# Altium PCB PCB_Thu.PcbDoc (part 1 of 2)
Units mm, origin at the board's own origin, x right, y up, seen from the top; angles counter-clockwise.
Board outline 107.94 x 47.36 mm, 2 copper layers (Top Layer, Bottom Layer); 234 components, 35 nets, 885 pads, 0 vias.
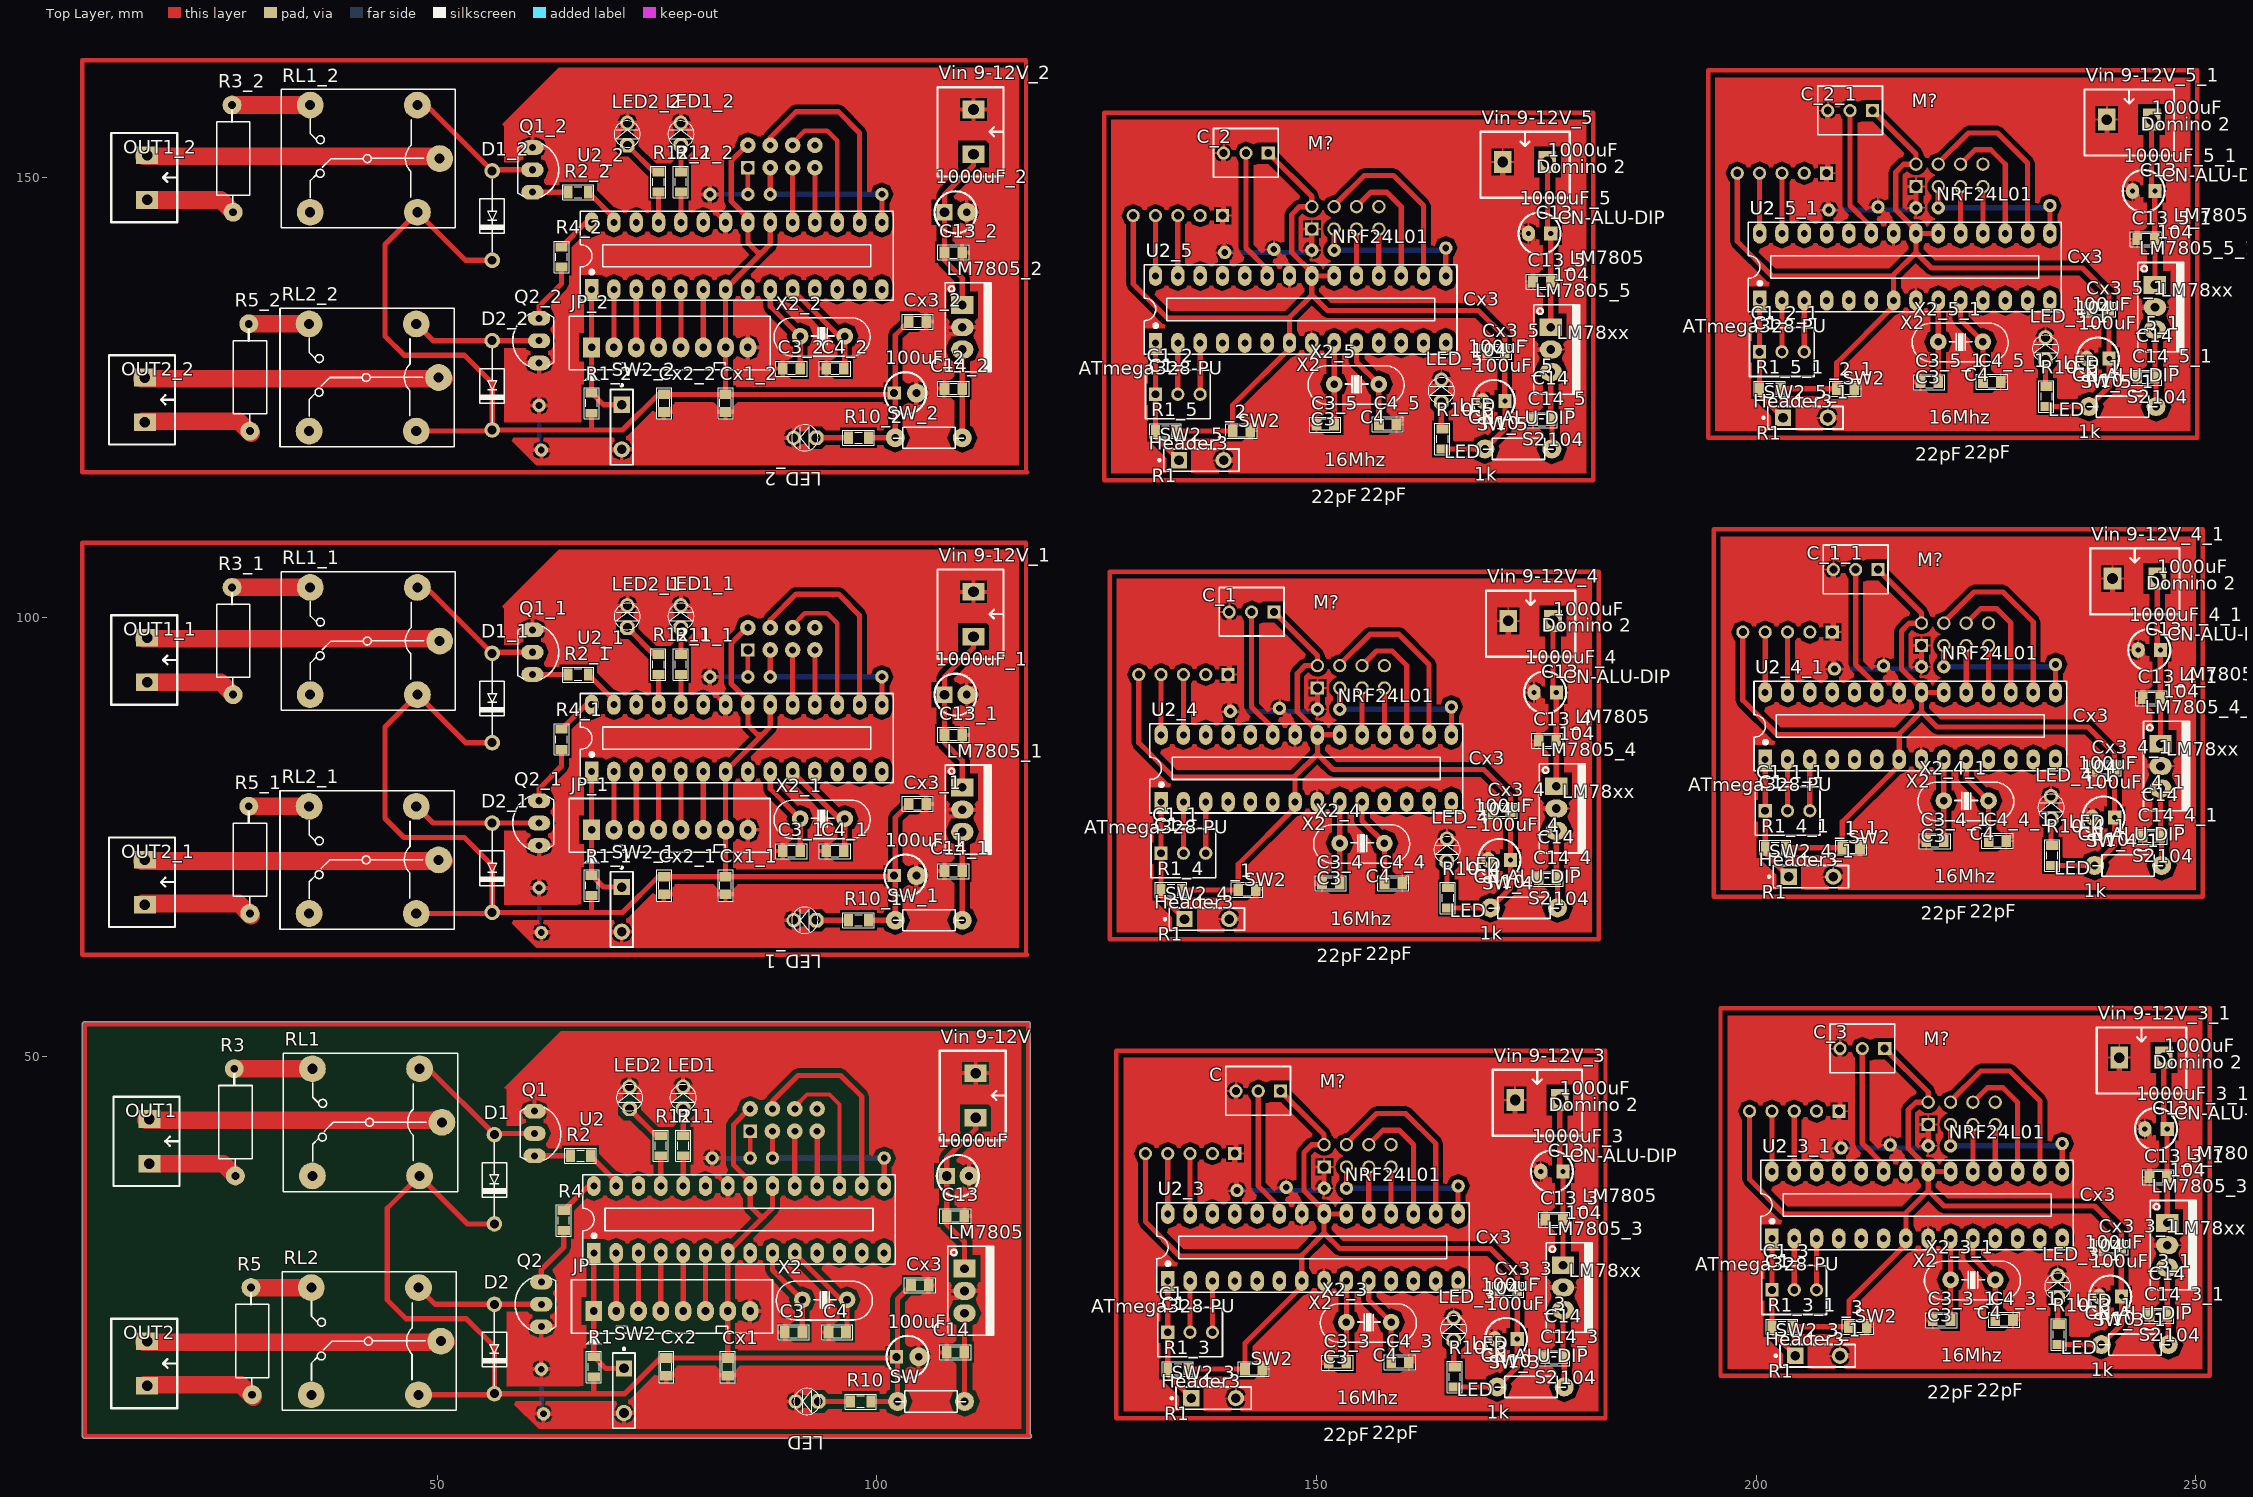
[diagram p0: Top Layer view]
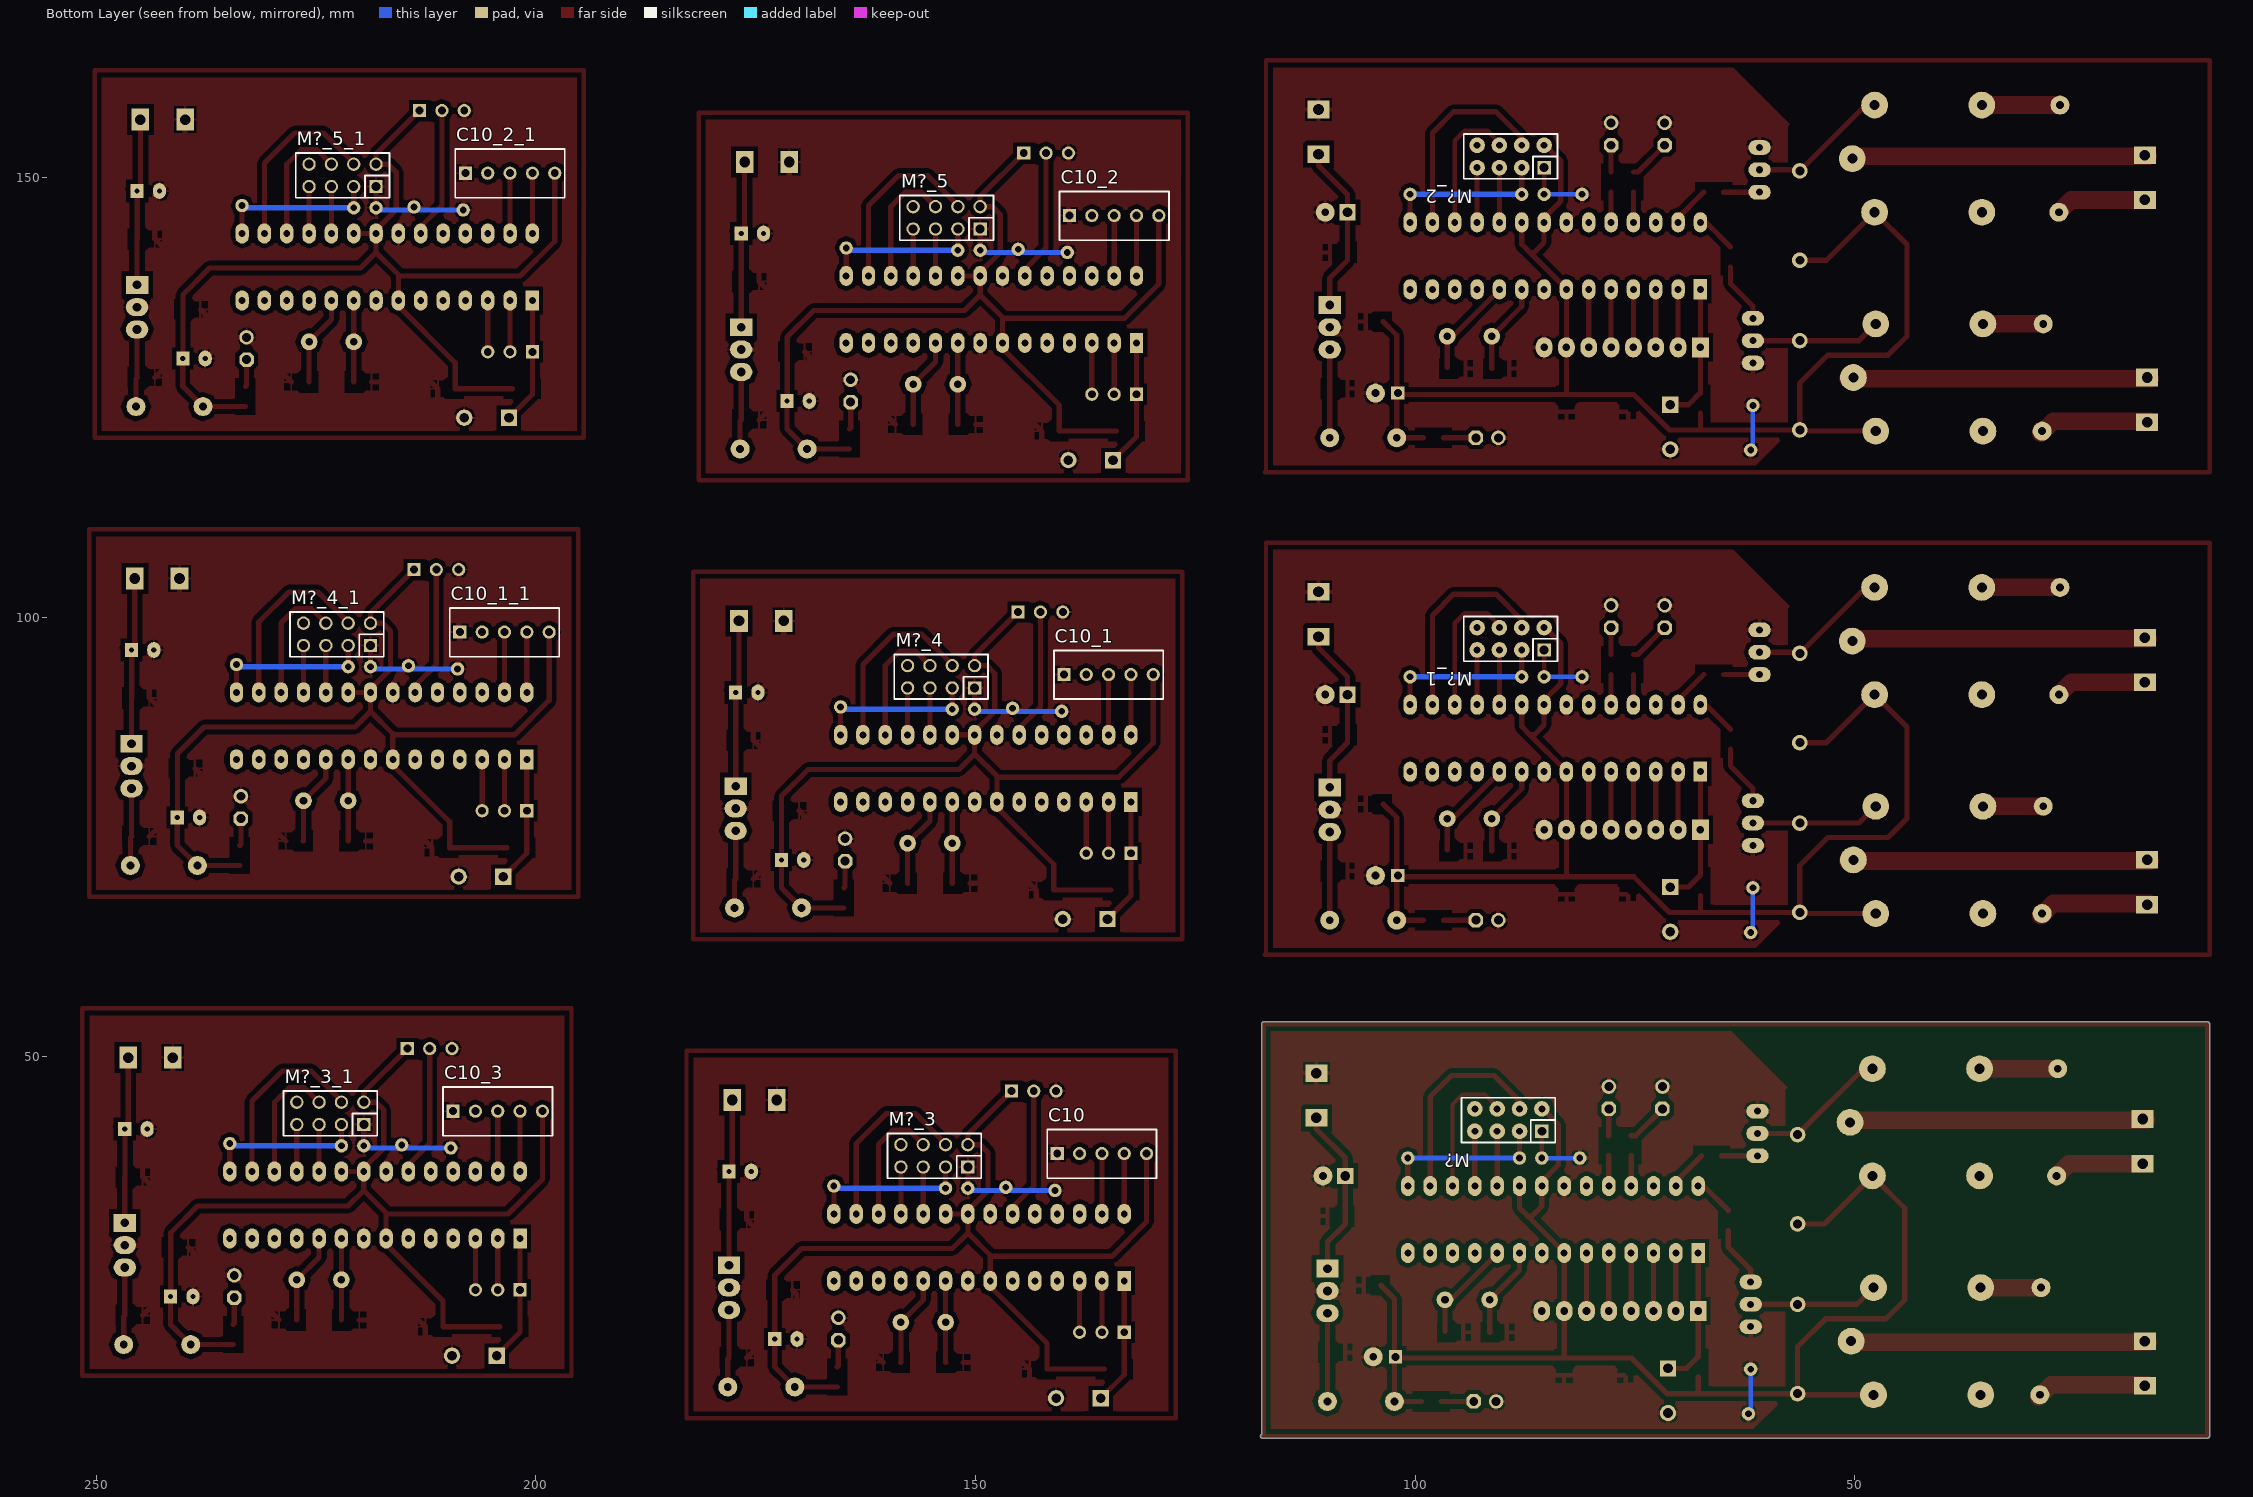
[diagram p1: Bottom Layer view, seen from below]

## Layer stack, top to bottom
Top Solder: solder mask 0.0102, Solder Resist, Dk 3.5
Top Layer: signal copper 0.0356
Dielectric 1: dielectric 0.32, FR-4, Dk 4.8
Bottom Layer: signal copper 0.0356
Bottom Solder: solder mask 0.0102, Solder Resist, Dk 3.5

## Board outline
9.656,6.858 ccw(c9.906,6.858) 9.906,6.608 117.348,6.608 ccw(c117.348,6.858) 117.598,6.858 ccw(c117.348,6.858) 117.471,7.076 117.471,53.721 ccw(c117.221,53.721) 117.221,53.971 9.906,53.971 ccw(c9.906,53.721) 9.656,53.721

## Design rules (kind name [scope] priority, off if disabled: settings)
Clearance [All] p1: gap=0.5
PlaneConnect [All] p1: planeconnectstyle=Relief reliefexpansion=0.508 reliefentries=4 reliefconductorwidth=0.5 reliefairgap=0.254
PolygonConnect [All] p1: connectstyle=Relief reliefconductorwidth=0.5 reliefentries=4 polygonreliefangle="90 Angle" airgapwidth=0.254
RoutingVias [All] p1: holewidth=0.711 width=1.27 viastyle="Through Hole" minholewidth=0.711 minwidth=1.27 maxholewidth=0.711 maxwidth=1.27
SolderMaskExpansion [All] p1: expansion=0.102
Width [All] p1: maxlimit=3 minlimit=0.5 preferedwidth=0.5
29 further rules are at their usual default settings.

## Classes and differential pairs
component class Schematic_Thu: 100uF 1000uF C3 C4 C13 C14 Cx1 Cx2 Cx3 D1 D2 JP LED LED1 LED2 LM7805 M? OUT1 OUT2 Q1 Q2 R1 R2 R3 R4 R5 R10 R11 R12 RL1 RL2 SW SW2 U2 "Vin 9-12V" X2

## Components (designator, comment, footprint, x,y, rotation, side; value= is the part's Value field where it differs from the comment)
100uF "CN-ALU-DIP" CA-ALU-2.54#1 103.505,15.875 r0 top
100uF_1 "CN-ALU-DIP" CA-ALU-2.54#1 103.251,70.612 r0 top (schematic designator 100uF)
100uF_2 "CN-ALU-DIP" CA-ALU-2.54#1 103.251,125.476 r0 top (schematic designator 100uF)
100uF_3 "CN-ALU-DIP" CA-ALU-2.54#2 171.577,17.907 r180 top (schematic designator 100uF)
100uF_3_1 "CN-ALU-DIP" CA-ALU-2.54#2 240.284,22.733 r180 top (schematic designator 100uF)
100uF_4 "CN-ALU-DIP" CA-ALU-2.54#2 170.815,72.39 r180 top (schematic designator 100uF)
100uF_4_1 "CN-ALU-DIP" CA-ALU-2.54#2 239.522,77.216 r180 top (schematic designator 100uF)
100uF_5 "CN-ALU-DIP" CA-ALU-2.54#2 170.18,124.587 r180 top (schematic designator 100uF)
100uF_5_1 "CN-ALU-DIP" CA-ALU-2.54#2 238.887,129.413 r180 top (schematic designator 100uF)
1000uF "CN-ALU-DIP" CA-ALU-2.54#3 109.22,36.449 r0 top
1000uF_1 "CN-ALU-DIP" CA-ALU-2.54#3 108.966,91.186 r0 top (schematic designator 1000uF)
1000uF_2 "CN-ALU-DIP" CA-ALU-2.54#3 108.966,146.05 r0 top (schematic designator 1000uF)
1000uF_3 "CN-ALU-DIP" CA-ALU-2.54#2 176.784,36.957 r180 top (schematic designator 1000uF)
1000uF_3_1 "CN-ALU-DIP" CA-ALU-2.54#2 245.491,41.783 r180 top (schematic designator 1000uF)
1000uF_4 "CN-ALU-DIP" CA-ALU-2.54#2 176.022,91.44 r180 top (schematic designator 1000uF)
1000uF_4_1 "CN-ALU-DIP" CA-ALU-2.54#2 244.729,96.266 r180 top (schematic designator 1000uF)
1000uF_5 "CN-ALU-DIP" CA-ALU-2.54#2 175.387,143.637 r180 top (schematic designator 1000uF)
1000uF_5_1 "CN-ALU-DIP" CA-ALU-2.54#2 244.094,148.463 r180 top (schematic designator 1000uF)
_1 "104" CN-SMD-0805 142.113,68.961 r180 top
_1_1 "104" CN-SMD-0805 210.82,73.787 r180 top
_2 "104" CN-SMD-0805 141.478,121.158 r180 top
_2_1 "104" CN-SMD-0805 210.185,125.984 r180 top
_3 "104" CN-SMD-0805 211.582,19.304 r180 top
C "Header3" HDR3 145.923,46.101 r180 top
C1 "Header3" HDR3 133.096,18.669 r0 top
C1_1 "Header3" HDR3 132.334,73.152 r0 top (schematic designator C1)
C1_1_1 "Header3" HDR3 201.041,77.978 r0 top (schematic designator C1)
C1_2 "Header3" HDR3 131.699,125.349 r0 top (schematic designator C1)
C1_2_1 "Header3" HDR3 200.406,130.175 r0 top (schematic designator C1)
C1_3 "Header3" HDR3 201.803,23.495 r0 top (schematic designator C1)
C3 "22p" CN-SMD-0805 90.551,18.669 r0 top
C3_1 "22p" CN-SMD-0805 90.297,73.406 r0 top (schematic designator C3)
C3_2 "22p" CN-SMD-0805 90.297,128.27 r0 top (schematic designator C3)
C3_3 "22p" CN-SMD-0805 152.4,15.24 r0 top (schematic designator C3)
C3_3_1 "22p" CN-SMD-0805 221.107,20.066 r0 top (schematic designator C3)
C3_4 "22p" CN-SMD-0805 151.638,69.723 r0 top (schematic designator C3)
C3_4_1 "22p" CN-SMD-0805 220.345,74.549 r0 top (schematic designator C3)
C3_5 "22p" CN-SMD-0805 151.003,121.92 r0 top (schematic designator C3)
C3_5_1 "22p" CN-SMD-0805 219.71,126.746 r0 top (schematic designator C3)
C4 "22p" CN-SMD-0805 95.504,18.669 r0 top
C4_1 "22p" CN-SMD-0805 95.25,73.406 r0 top (schematic designator C4)
C4_2 "22p" CN-SMD-0805 95.25,128.27 r0 top (schematic designator C4)
C4_3 "22p" CN-SMD-0805 159.512,15.24 r180 top (schematic designator C4)
C4_3_1 "22p" CN-SMD-0805 228.219,20.066 r180 top (schematic designator C4)
C4_4 "22p" CN-SMD-0805 158.75,69.723 r180 top (schematic designator C4)
C4_4_1 "22p" CN-SMD-0805 227.457,74.549 r180 top (schematic designator C4)
C4_5 "22p" CN-SMD-0805 158.115,121.92 r180 top (schematic designator C4)
C4_5_1 "22p" CN-SMD-0805 226.822,126.746 r180 top (schematic designator C4)
C10 "Header5" HDR5 140.716,38.989 r180 bottom
C10_1 "Header5" HDR5 139.954,93.472 r180 bottom (schematic designator C10)
C10_1_1 "Header5" HDR5 208.661,98.298 r180 bottom (schematic designator C10)
C10_2 "Header5" HDR5 139.319,145.669 r180 bottom (schematic designator C10)
C10_2_1 "Header5" HDR5 208.026,150.495 r180 bottom (schematic designator C10)
C10_3 "Header5" HDR5 209.423,43.815 r180 bottom (schematic designator C10)
C13 "104" CN-SMD-0805 108.966,31.877 r180 top
C13_1 "104" CN-SMD-0805 108.712,86.614 r180 top (schematic designator C13)
C13_2 "104" CN-SMD-0805 108.712,141.478 r180 top (schematic designator C13)
C13_3 "104" CN-SMD-0805 177.038,31.496 r0 top (schematic designator C13)
C13_3_1 "104" CN-SMD-0805 245.745,36.322 r0 top (schematic designator C13)
C13_4 "104" CN-SMD-0805 176.276,85.979 r0 top (schematic designator C13)
C13_4_1 "104" CN-SMD-0805 244.983,90.805 r0 top (schematic designator C13)
C13_5 "104" CN-SMD-0805 175.641,138.176 r0 top (schematic designator C13)
C13_5_1 "104" CN-SMD-0805 244.348,143.002 r0 top (schematic designator C13)
C14 "104" CN-SMD-0805 108.966,16.383 r0 top
C14_1 "104" CN-SMD-0805 108.712,71.12 r0 top (schematic designator C14)
C14_2 "104" CN-SMD-0805 108.712,125.984 r0 top (schematic designator C14)
C14_3 "104" CN-SMD-0805 177.038,15.748 r0 top (schematic designator C14)
C14_3_1 "104" CN-SMD-0805 245.745,20.574 r0 top (schematic designator C14)
C14_4 "104" CN-SMD-0805 176.276,70.231 r0 top (schematic designator C14)
C14_4_1 "104" CN-SMD-0805 244.983,75.057 r0 top (schematic designator C14)
C14_5 "104" CN-SMD-0805 175.641,122.428 r0 top (schematic designator C14)
C14_5_1 "104" CN-SMD-0805 244.348,127.254 r0 top (schematic designator C14)
C_1 "Header3" HDR3 145.161,100.584 r180 top (schematic designator C)
C_1_1 "Header3" HDR3 213.868,105.41 r180 top (schematic designator C)
C_2 "Header3" HDR3 144.526,152.781 r180 top (schematic designator C)
C_2_1 "Header3" HDR3 213.233,157.607 r180 top (schematic designator C)
C_3 "Header3" HDR3 214.63,50.927 r180 top (schematic designator C)
Cx1 "104" CN-SMD-0805 83.058,14.732 r90 top
Cx1_1 "104" CN-SMD-0805 82.804,69.469 r90 top (schematic designator Cx1)
Cx1_2 "104" CN-SMD-0805 82.804,124.333 r90 top (schematic designator Cx1)
Cx2 "104" CN-SMD-0805 76.073,14.732 r90 top
Cx2_1 "104" CN-SMD-0805 75.819,69.469 r90 top (schematic designator Cx2)
Cx2_2 "104" CN-SMD-0805 75.819,124.333 r90 top (schematic designator Cx2)
Cx3 "104" CN-SMD-0805 104.902,24.003 r180 top
Cx3_1 "104" CN-SMD-0805 104.648,78.74 r180 top (schematic designator Cx3)
Cx3_2 "104" CN-SMD-0805 104.648,133.604 r180 top (schematic designator Cx3)
Cx3_3 "104" CN-SMD-0805 171.831,23.495 r0 top (schematic designator Cx3)
Cx3_3_1 "104" CN-SMD-0805 240.538,28.321 r0 top (schematic designator Cx3)
Cx3_4 "104" CN-SMD-0805 171.069,77.978 r0 top (schematic designator Cx3)
Cx3_4_1 "104" CN-SMD-0805 239.776,82.804 r0 top (schematic designator Cx3)
Cx3_5 "104" CN-SMD-0805 170.434,130.175 r0 top (schematic designator Cx3)
Cx3_5_1 "104" CN-SMD-0805 239.141,135.001 r0 top (schematic designator Cx3)
D1 "Diode" DIO-1A 56.515,41.148 r270 top
D1_1 "Diode" DIO-1A 56.261,95.885 r270 top (schematic designator D1)
D1_2 "Diode" DIO-1A 56.261,150.749 r270 top (schematic designator D1)
D2 "Diode" DIO-1A 56.515,21.844 r270 top
D2_1 "Diode" DIO-1A 56.261,76.581 r270 top (schematic designator D2)
D2_2 "Diode" DIO-1A 56.261,131.445 r270 top (schematic designator D2)
JP "JP8" Header8 67.818,21.082 r0 top
JP_1 "JP8" Header8 67.564,75.819 r0 top (schematic designator JP)
JP_2 "JP8" Header8 67.564,130.683 r0 top (schematic designator JP)
LED "LED" LED-3MM-RED 93.345,10.795 r180 top
LED1 "LED" LED-3MM-RED 77.978,44.069 r90 top
LED1_1 "LED" LED-3MM-RED 77.724,98.806 r90 top (schematic designator LED1)
LED1_2 "LED" LED-3MM-RED 77.724,153.67 r90 top (schematic designator LED1)
LED2 "LED" LED-3MM-RED 71.882,44.069 r90 top
LED2_1 "LED" LED-3MM-RED 71.628,98.806 r90 top (schematic designator LED2)
LED2_2 "LED" LED-3MM-RED 71.628,153.67 r90 top (schematic designator LED2)
LED_1 "LED" LED-3MM-RED 93.091,65.532 r180 top (schematic designator LED)
LED_2 "LED" LED-3MM-RED 93.091,120.396 r180 top (schematic designator LED)
LED_3 "LED" LED-3MM-RED 165.608,17.78 r90 top (schematic designator LED)
LED_3_1 "LED" LED-3MM-RED 234.315,22.606 r90 top (schematic designator LED)
LED_4 "LED" LED-3MM-RED 164.846,72.263 r90 top (schematic designator LED)
LED_4_1 "LED" LED-3MM-RED 233.553,77.089 r90 top (schematic designator LED)
LED_5 "LED" LED-3MM-RED 164.211,124.46 r90 top (schematic designator LED)
LED_5_1 "LED" LED-3MM-RED 232.918,129.286 r90 top (schematic designator LED)
LM7805 "LM78xx" TO220-123 109.982,25.908 r270 top
LM7805_1 "LM78xx" TO220-123 109.728,80.645 r270 top (schematic designator LM7805)
LM7805_2 "LM78xx" TO220-123 109.728,135.509 r270 top (schematic designator LM7805)
LM7805_3 "LM78xx" TO220-123 178.054,26.289 r270 top (schematic designator LM7805)
LM7805_3_1 "LM78xx" TO220-123 246.761,31.115 r270 top (schematic designator LM7805)
LM7805_4 "LM78xx" TO220-123 177.292,80.772 r270 top (schematic designator LM7805)
LM7805_4_1 "LM78xx" TO220-123 245.999,85.598 r270 top (schematic designator LM7805)
LM7805_5 "LM78xx" TO220-123 176.657,132.969 r270 top (schematic designator LM7805)
LM7805_5_1 "LM78xx" TO220-123 245.364,137.795 r270 top (schematic designator LM7805)
M? "NRF24L01" JP4-C2T#1 89.408,42.799 r0 bottom
M?_1 "NRF24L01" JP4-C2T#1 89.154,97.536 r0 bottom (schematic designator M?)
M?_2 "NRF24L01" JP4-C2T#1 89.154,152.4 r0 bottom (schematic designator M?)
M?_3 "NRF24L01" JP4-C2T#2 154.686,38.735 r0 bottom (schematic designator M?)
M?_3_1 "NRF24L01" JP4-C2T#2 223.393,43.561 r0 bottom (schematic designator M?)
M?_4 "NRF24L01" JP4-C2T#2 153.924,93.218 r0 bottom (schematic designator M?)
M?_4_1 "NRF24L01" JP4-C2T#2 222.631,98.044 r0 bottom (schematic designator M?)
M?_5 "NRF24L01" JP4-C2T#2 153.289,145.415 r0 bottom (schematic designator M?)
M?_5_1 "NRF24L01" JP4-C2T#2 221.996,150.241 r0 bottom (schematic designator M?)
OUT1 "Domino 2" "DOMINO 2- 5mm" 17.272,40.386 r270 top
OUT1_1 "Domino 2" "DOMINO 2- 5mm" 17.018,95.123 r270 top (schematic designator OUT1)
OUT1_2 "Domino 2" "DOMINO 2- 5mm" 17.018,149.987 r270 top (schematic designator OUT1)
OUT2 "Domino 2" "DOMINO 2- 5mm" 17.018,15.113 r270 top
OUT2_1 "Domino 2" "DOMINO 2- 5mm" 16.764,69.85 r270 top (schematic designator OUT2)
OUT2_2 "Domino 2" "DOMINO 2- 5mm" 16.764,124.714 r270 top (schematic designator OUT2)
Q1 "2SC1815" TO92-123 61.087,41.275 r270 top
Q1_1 "2SC1815" TO92-123 60.833,96.012 r270 top (schematic designator Q1)
Q1_2 "2SC1815" TO92-123 60.833,150.876 r270 top (schematic designator Q1)
Q2 "2SC1815" TO92-123 61.849,21.844 r90 top
Q2_1 "2SC1815" TO92-123 61.595,76.581 r90 top (schematic designator Q2)
Q2_2 "2SC1815" TO92-123 61.595,131.445 r90 top (schematic designator Q2)
R1 "10k" RES-SMD-0805 67.818,14.732 r90 top
R1_1 "10k" RES-SMD-0805 67.564,69.469 r90 top (schematic designator R1)
R1_2 "10k" RES-SMD-0805 67.564,124.333 r90 top (schematic designator R1)
R1_3 "10k" RES-SMD-0805 134.239,14.478 r180 top (schematic designator R1)
R1_3_1 "10k" RES-SMD-0805 202.946,19.304 r180 top (schematic designator R1)
R1_4 "10k" RES-SMD-0805 133.477,68.961 r180 top (schematic designator R1)
R1_4_1 "10k" RES-SMD-0805 202.184,73.787 r180 top (schematic designator R1)
R1_5 "10k" RES-SMD-0805 132.842,121.158 r180 top (schematic designator R1)
R1_5_1 "10k" RES-SMD-0805 201.549,125.984 r180 top (schematic designator R1)
R2 "10k" RES-SMD-0805 66.294,38.735 r0 top
R2_1 "10k" RES-SMD-0805 66.04,93.472 r0 top (schematic designator R2)
R2_2 "10k" RES-SMD-0805 66.04,148.336 r0 top (schematic designator R2)
R3 "1k" RES-1/2W 27.051,43.053 r270 top
R3_1 "1k" RES-1/2W 26.797,97.79 r270 top (schematic designator R3)
R3_2 "1k" RES-1/2W 26.797,152.654 r270 top (schematic designator R3)
R4 "10k" RES-SMD-0805 64.389,31.369 r90 top
R4_1 "10k" RES-SMD-0805 64.135,86.106 r90 top (schematic designator R4)
R4_2 "10k" RES-SMD-0805 64.135,140.97 r90 top (schematic designator R4)
R5 "1k" RES-1/2W 28.956,18.161 r270 top
R5_1 "1k" RES-1/2W 28.702,72.898 r270 top (schematic designator R5)
R5_2 "1k" RES-1/2W 28.702,127.762 r270 top (schematic designator R5)
R10 "1k" RES-SMD-0805 98.171,10.795 r0 top
R10_1 "1k" RES-SMD-0805 97.917,65.532 r0 top (schematic designator R10)
R10_2 "1k" RES-SMD-0805 97.917,120.396 r0 top (schematic designator R10)
R10_3 "1k" RES-SMD-0805 165.735,13.589 r270 top (schematic designator R10)
R10_3_1 "1k" RES-SMD-0805 234.442,18.415 r270 top (schematic designator R10)
R10_4 "1k" RES-SMD-0805 164.973,68.072 r270 top (schematic designator R10)
R10_4_1 "1k" RES-SMD-0805 233.68,72.898 r270 top (schematic designator R10)
R10_5 "1k" RES-SMD-0805 164.338,120.269 r270 top (schematic designator R10)
R10_5_1 "1k" RES-SMD-0805 233.045,125.095 r270 top (schematic designator R10)
R11 "1k" RES-SMD-0805 77.978,39.878 r270 top
R11_1 "1k" RES-SMD-0805 77.724,94.615 r270 top (schematic designator R11)
R11_2 "1k" RES-SMD-0805 77.724,149.479 r270 top (schematic designator R11)
R12 "1k" RES-SMD-0805 75.438,39.878 r270 top
R12_1 "1k" RES-SMD-0805 75.184,94.615 r270 top (schematic designator R12)
R12_2 "1k" RES-SMD-0805 75.184,149.479 r270 top (schematic designator R12)
RL1 "Relay 10A/5V" "RELAY 5" 42.291,42.545 r180 top
RL1_1 "Relay 10A/5V" "RELAY 5" 42.037,97.282 r180 top (schematic designator RL1)
RL1_2 "Relay 10A/5V" "RELAY 5" 42.037,152.146 r180 top (schematic designator RL1)
RL2 "Relay 10A/5V" "RELAY 5" 42.164,17.653 r180 top
RL2_1 "Relay 10A/5V" "RELAY 5" 41.91,72.39 r180 top (schematic designator RL2)
RL2_2 "Relay 10A/5V" "RELAY 5" 41.91,127.254 r180 top (schematic designator RL2)
SW "Switch" RES-1/4W-SMALL 105.918,10.795 r0 top
SW2 "SW-PB" SPST-2 71.247,12.019 r270 top
SW2_1 "SW-PB" SPST-2 70.993,66.756 r270 top (schematic designator SW2)
SW2_2 "SW-PB" SPST-2 70.993,121.62 r270 top (schematic designator SW2)
SW2_3 "SW-PB" SPST-2 138.303,11.176 r0 top (schematic designator SW2)
SW2_3_1 "SW-PB" SPST-2 207.01,16.002 r0 top (schematic designator SW2)
SW2_4 "SW-PB" SPST-2 137.541,65.659 r0 top (schematic designator SW2)
SW2_4_1 "SW-PB" SPST-2 206.248,70.485 r0 top (schematic designator SW2)
SW2_5 "SW-PB" SPST-2 136.906,117.856 r0 top (schematic designator SW2)
SW2_5_1 "SW-PB" SPST-2 205.613,122.682 r0 top (schematic designator SW2)
SW_1 "Switch" RES-1/4W-SMALL 105.664,65.532 r0 top (schematic designator SW)
SW_2 "Switch" RES-1/4W-SMALL 105.664,120.396 r0 top (schematic designator SW)
SW_3 "Switch" RES-1/4W-SMALL 174.117,12.446 r0 top (schematic designator SW)
SW_3_1 "Switch" RES-1/4W-SMALL 242.824,17.272 r0 top (schematic designator SW)
SW_4 "Switch" RES-1/4W-SMALL 173.355,66.929 r0 top (schematic designator SW)
SW_4_1 "Switch" RES-1/4W-SMALL 242.062,71.755 r0 top (schematic designator SW)
SW_5 "Switch" RES-1/4W-SMALL 172.72,119.126 r0 top (schematic designator SW)
SW_5_1 "Switch" RES-1/4W-SMALL 241.427,123.952 r0 top (schematic designator SW)
U2 "ATmega328-PU" DIP28 67.818,27.686 r0 top
U2_1 "ATmega328-PU" DIP28 67.564,82.423 r0 top (schematic designator U2)
U2_2 "ATmega328-PU" DIP28 67.564,137.287 r0 top (schematic designator U2)
U2_3 "ATmega328-PU" DIP28 133.096,24.511 r0 top (schematic designator U2)
U2_3_1 "ATmega328-PU" DIP28 201.803,29.337 r0 top (schematic designator U2)
U2_4 "ATmega328-PU" DIP28 132.334,78.994 r0 top (schematic designator U2)
U2_4_1 "ATmega328-PU" DIP28 201.041,83.82 r0 top (schematic designator U2)
U2_5 "ATmega328-PU" DIP28 131.699,131.191 r0 top (schematic designator U2)
U2_5_1 "ATmega328-PU" DIP28 200.406,136.017 r0 top (schematic designator U2)
"Vin 9-12V" "Domino 2" "DOMINO 2- 5mm" 111.252,45.593 r270 top
"Vin 9-12V_1" "Domino 2" "DOMINO 2- 5mm" 110.998,100.33 r270 top (schematic designator "Vin 9-12V")
"Vin 9-12V_2" "Domino 2" "DOMINO 2- 5mm" 110.998,155.194 r270 top (schematic designator "Vin 9-12V")
"Vin 9-12V_3" "Domino 2" "DOMINO 2- 5mm" 175.133,45.085 r0 top (schematic designator "Vin 9-12V")
"Vin 9-12V_3_1" "Domino 2" "DOMINO 2- 5mm" 243.84,49.911 r0 top (schematic designator "Vin 9-12V")
"Vin 9-12V_4" "Domino 2" "DOMINO 2- 5mm" 174.371,99.568 r0 top (schematic designator "Vin 9-12V")
"Vin 9-12V_4_1" "Domino 2" "DOMINO 2- 5mm" 243.078,104.394 r0 top (schematic designator "Vin 9-12V")
"Vin 9-12V_5" "Domino 2" "DOMINO 2- 5mm" 173.736,151.765 r0 top (schematic designator "Vin 9-12V")
"Vin 9-12V_5_1" "Domino 2" "DOMINO 2- 5mm" 242.443,156.591 r0 top (schematic designator "Vin 9-12V")
X2 "16Mhz" XT2 94.079,22.352 r180 top
X2_1 "16Mhz" XT2 93.825,77.089 r180 top (schematic designator X2)
X2_2 "16Mhz" XT2 93.825,131.953 r180 top (schematic designator X2)
X2_3 "16Mhz" XT2 155.956,19.812 r180 top (schematic designator X2)
X2_3_1 "16Mhz" XT2 224.663,24.638 r180 top (schematic designator X2)
X2_4 "16Mhz" XT2 155.194,74.295 r180 top (schematic designator X2)
X2_4_1 "16Mhz" XT2 223.901,79.121 r180 top (schematic designator X2)
X2_5 "16Mhz" XT2 154.559,126.492 r180 top (schematic designator X2)
X2_5_1 "16Mhz" XT2 223.266,131.318 r180 top (schematic designator X2)
? "104" CN-SMD-0805 142.875,14.478 r180 top

## Footprints (in the part's own frame and the unit in brackets; to place one, negate y for a bottom-side part, rotate by r counter-clockwise, add the part's x,y. Pads: shape width x height; smd on the part's side, far side on the other; paste and mask are expansions set on the pad)
CA-ALU-2.54#1 [mm]
  rect 1.5x1.5 hole 0.9: 1(-1.27,0)
  round 2.159 hole 0.889: 2(1.27,0)
  silkscreen extent -2.39,-2.39 2.39,2.39, body extent -2,-2.03 1.99,1.97, height 7.01
CA-ALU-2.54#2 [mm]
  rect 1.5x1.58 hole 0.6: 1(-1.27,0)
  oval 1.5x1.8 hole 0.6: 2(1.27,0)
  silkscreen extent -2.39,-2.39 2.39,2.39, body extent -2,-2.03 1.99,1.97, height 7.01
CA-ALU-2.54#3 [mm]
  rect 1.85x1.85 hole 1.1: 1(-1.27,0)
  round 2.159 hole 0.889: 2(1.27,0)
  silkscreen extent -2.39,-2.39 2.39,2.39, body extent -2,-2.03 1.99,1.97, height 7.01
CN-SMD-0805 [mm]
  rect 1.1x1.397 smd: 1(-1,0) 2(1,0)
  silkscreen extent -1.78,-0.86 1.78,0.84, body extent -1,-0.62 1,0.63, height 0.8
DIO-1A [mil]
  round 70 hole 40: 1(0,0) 2(400,0)
  silkscreen extent 35,-55 365,55, body extent -11,-50 411,54, height 102
DIP28 [mil] "DIP, 18-Leads, Row Spacing 7.62mm, Pitch 2.54mm, Body 22.8x7.3mm, Window"
  rect 60x90 hole 31: 1(0,0)
  oval 60x90 hole 31: 2(100,0) 3(200,0) 4(300,0) 5(400,0) 6(500,0) 7(600,0) 8(700,0) 9(800,0) 10(900,0) 11(1000,0) 12(1100,0) 13(1200,0) 14(1300,0) 15(1300,300) 16(1200,300) 17(1100,300) 18(1000,300) 19(900,300) 20(800,300) 21(700,300) 22(600,300) 23(500,300) 24(400,300) 25(300,300) 26(200,300) 27(100,300) 28(0,300)
  silkscreen extent -50,-50 1350,350, body extent -50,-10 1367,300, height 200
"DOMINO 2- 5mm" [mm]
  rect 2x2.5 hole 1.2: 1(-2.54,0) 2(2.54,0)
  silkscreen extent -5.08,-4.08 5.08,3.43, body extent -5,-4.07 5,3.43, height 10
HDR3 [mm] "Connector; Header; 3 Position"
  rect 1.5x1.5 hole 0.9: 1(0,0)
  round 1.5 hole 0.9: 2(2.54,0) 3(5.08,0)
  silkscreen extent -1.14,-2.79 6.22,2.74, body extent -1.27,-2.92 6.35,2.88, height 11.72
HDR5 [mm] "Connector; Header; 5 Position"
  rect 1.5x1.5 hole 0.9: 1(0,0)
  round 1.5 hole 0.9: 2(2.54,0) 3(5.08,0) 4(7.62,0) 5(10.16,0)
  silkscreen extent -1.14,-2.79 11.3,2.74, body extent -1.27,-2.92 11.43,2.88, height 11.72
Header8 [mil] "CON8"
  rect 75x90 hole 34: 1(0,0)
  oval 75x90 hole 34: 2(100,0) 3(200,0) 4(300,0) 5(400,0) 6(500,0) 7(600,0) 8(700,0)
  silkscreen extent -100,-150 800,140
JP4-C2T#1 [mil] "8 pins, dual row, straight, gold plating"
  rect 59.84x59.84 hole 40.16: 1(-150,50)
  round 70 hole 31: 2(-50,50) 3(50,50) 4(150,50) 5(150,-50) 6(50,-50) 7(-50,-50) 8(-150,-50)
  silkscreen extent -210,-100 210,100, body extent -210,-100 210,100, height 335
JP4-C2T#2 [mil] "8 pins, dual row, straight, gold plating"
  rect 59.84x59.84 hole 40.16: 1(-150,50)
  round 59.84 hole 40.16: 2(-50,50) 3(50,50) 4(150,50) 5(150,-50) 6(50,-50) 7(-50,-50) 8(-150,-50)
  silkscreen extent -210,-100 210,100, body extent -210,-100 210,100, height 335
LED-3MM-RED [mil]
  oct 65x65 hole 40: 1(0,0)
  round 65 hole 40: 2(100,0)
  silkscreen extent -9,-59 109,59, body extent -27,-77 117,80, height 181
"RELAY 5" [mil] "Reley DPDT, 8 pin, 1A, W400mil, L800mil,H 300mil"
  round 120 hole 45: 1(-325,0) 2(255,240) 3(255,-240) 4(-225,-240) 5(-225,240)
  silkscreen extent -395,-310 385,310, body extent -371,-304 381,306, height 602
RES-1/2W [mil]
  round 85 hole 35: 1(-220,-5) 2(260,0)
  silkscreen extent -195,-74 221,75, body extent -230,-60 270,56, height 121
RES-1/4W-SMALL [mil]
  round 85 hole 35: 1(-140,0) 2(160,0)
  silkscreen extent -148,-47 166,47, body extent -152,-47 172,47, height 97
RES-SMD-0805 [mil]
  rect 39.37x55 smd: 1(-45,0) 2(45,0)
  silkscreen extent -70,-34 70,33, body extent -39,-25 39,25, height 31
SPST-2 [mm] "Switch; 2 Leads"
  rect 1.85x1.85 hole 1.1: 1(-2.54,0)
  round 1.85 hole 1.1: 2(2.54,0)
  silkscreen extent -4.89,-1.27 4.28,1.27
TO92-123 [mil] "TO-92"
  oval 66x100 hole 32: 1(-100,0) 2(0,0) 3(100,0)
  silkscreen extent -117,-65 120,118, body extent -109,-66 109,95, height 245
TO220-123 [mil] "TO-220 - 1-2-3"
  rect 80x100 hole 39: 1(0,0)
  oval 80x100 hole 39: 2(100,0) 3(200,0)
  silkscreen extent -100,-76 300,130, body extent -95,-80 295,97, height 323
XT2 [mil] "Footpin for Crystal 2 pin"
  round 75 hole 34: 1(-100,0) 2(100,0)
  silkscreen extent -213,-83 217,90, body extent -216,-87 216,90, height 144

## Part data
100uF 100uF_1 100uF_2 100uF_3 100uF_3_1 100uF_4 100uF_4_1 100uF_5 100uF_5_1 1000uF 1000uF_1 1000uF_2 1000uF_3 1000uF_3_1 1000uF_4 1000uF_4_1 1000uF_5 1000uF_5_1: "Capacitor (Semiconductor SIM Model)"
_1 _1_1 _2 _2_1 _3 C3 C3_1 C3_2 C3_3 C3_3_1 C3_4 C3_4_1 C3_5 C3_5_1 C4 C4_1 C4_2 C4_3 C4_3_1 C4_4 C4_4_1 C4_5 C4_5_1 C13 C13_1 C13_2 C13_3 C13_3_1 C13_4 C13_4_1 C13_5 C13_5_1 C14 C14_1 C14_2 C14_3 C14_3_1 C14_4 C14_4_1 C14_5 C14_5_1 Cx1 Cx1_1 Cx1_2 Cx2 Cx2_1 Cx2_2 Cx3 Cx3_1 Cx3_2 Cx3_3 Cx3_3_1 Cx3_4 Cx3_4_1 Cx3_5 Cx3_5_1 ?: library part CN
C C1 C1_1 C1_1_1 C1_2 C1_2_1 C1_3 C_1 C_1_1 C_2 C_2_1 C_3: "Header IDC, 3 x 1 Pin Vertical 2.54mm Pitch (Non-Boxed, Male)"
C10 C10_1 C10_1_1 C10_2 C10_2_1 C10_3: "Header IDC, 5 x 1 Pin Vertical 2.54mm Pitch (Non-Boxed, Male)"
D1 D1_1 D1_2 D2 D2_1 D2_2: "Default Diode"
JP JP_1 JP_2: library part Header8, "Connector 8"
LED LED1 LED1_1 LED1_2 LED2 LED2_1 LED2_2 LED_1 LED_2 LED_3 LED_3_1 LED_4 LED_4_1 LED_5 LED_5_1: "LED Single colour Green and Red"
LM7805 LM7805_1 LM7805_2 LM7805_3 LM7805_3_1 LM7805_4 LM7805_4_1 LM7805_5 LM7805_5_1: "Positive Voltage Regulator"
OUT1 OUT1_1 OUT1_2 OUT2 OUT2_1 OUT2_2 "Vin 9-12V" "Vin 9-12V_1" "Vin 9-12V_2" "Vin 9-12V_3" "Vin 9-12V_3_1" "Vin 9-12V_4" "Vin 9-12V_4_1" "Vin 9-12V_5" "Vin 9-12V_5_1": "Domino, 2-Pin"
Q1 Q1_1 Q1_2 Q2 Q2_1 Q2_2: "NPN 600mW, ECB"
R1 R1_1 R1_2 R1_3 R1_3_1 R1_4 R1_4_1 R1_5 R1_5_1 R2 R2_1 R2_2 R4 R4_1 R4_2 R10 R10_1 R10_2 R10_3 R10_3_1 R10_4 R10_4_1 R10_5 R10_5_1 R11 R11_1 R11_2 R12 R12_1 R12_2: library part Res-SMD, "Resistor"
R3 R3_1 R3_2 R5 R5_1 R5_2 SW SW_1 SW_2 SW_3 SW_3_1 SW_4 SW_4_1 SW_5 SW_5_1: library part Res, "Res"
RL1 RL1_1 RL1_2 RL2 RL2_1 RL2_2: library part "Relay 5", "Relay SPDT,10A - 12VDC 5 Pin"
SW2 SW2_1 SW2_2 SW2_3 SW2_3_1 SW2_4 SW2_4_1 SW2_5 SW2_5_1: "Switch"
U2 U2_1 U2_2 U2_3 U2_3_1 U2_4 U2_4_1 U2_5 U2_5_1: "8-bit AVR Microcontroller, 32KB Flash, 1KB EEPROM, 2KB SRAM, 28-pin PDIP, Industrial Grade (-40°C to 85°C)"
X2 X2_1 X2_2 X2_3 X2_3_1 X2_4 X2_4_1 X2_5 X2_5_1: library part XT2, "Crystal, 32.768 KHz, -40 to 85 degC, 3.2 x 1.5 x 0.9 mm SMD"

## Free pads (board coordinates)
  round 1.524 hole 0.762: 2(152.019,141.732) 2(152.654,89.535) 2(153.416,35.052) 2(220.726,146.558) 2(221.361,94.361) 2(222.123,39.878) 3(164.719,141.986) 3(165.354,89.789) 3(166.116,35.306) 3(233.426,146.812) 3(234.061,94.615) 3(234.823,40.132) 4(149.479,141.732) 4(150.114,89.535) 4(150.876,35.052) 4(218.186,146.558) 4(218.821,94.361) 4(219.583,39.878) 5(139.573,141.478) 5(140.208,89.281) 5(140.97,34.798) 5(208.28,146.304) 5(208.915,94.107) 5(209.677,39.624) 6(145.161,141.827) 6(145.796,89.63) 6(146.558,35.147) 6(213.868,146.653) 6(214.503,94.456) 6(215.265,39.973) 10(85.344,93.218) 10(85.344,148.082) 10(85.598,38.481) 32(81.026,93.218) 32(81.026,148.082) 32(81.28,38.481) 33(87.884,93.218) 33(87.884,148.082) 33(88.138,38.481) 34(100.584,93.218) 34(100.584,148.082) 34(100.838,38.481) 35(61.595,69.215) 35(61.595,124.079) 35(61.849,14.478) 36(61.849,64.135) 36(61.849,118.999) 36(62.103,9.398)

## Nets (pads, with @x,y where several pads share a name; then routed paths per layer and width w, separated by ;. In a path a pad name is that pad's centre, name@x,y a point inside that pad or via, vN(x,y) a via of type N, cw(c..) or ccw(c..) an arc to the next point about the centre after c; other vN are vias at no path point)
5: JP.5 U2.5 | length 6.6
  Top Layer w0.6: JP.5@77.978,21.082 U2.5@77.978,27.686
CE: M?.2 pad.33@88.138,38.481 pad.34@100.838,38.481 U2.15 | length 18.9
  Top Layer w0.6: pad.33@88.138,38.481 M?.2@88.138,41.529 ; U2.15@100.838,35.306 pad.34@100.838,38.481
  Bottom Layer w0.6: pad.33@88.138,38.481 pad.34@100.838,38.481
CSN: M?.7 U2.16 | length 23.8
  Top Layer w0.6: M?.7@88.138,44.069 88.138,44.958 91.059,47.879 95.885,47.879 98.298,45.466 U2.16@98.298,35.306 U2.16@98.044,35.56
GND: 100uF.2 1000uF.2 "Vin 9-12V.1" C3.1 C4.1 C13.1 C14.1 Cx1.1 Cx2.1 Cx3.1 JP.8 LED1.2 LED2.2 LED.2 LM7805.2 M?.1 pad.10@85.598,38.481 pad.32@81.28,38.481 pad.35@61.849,14.478 pad.36@62.103,9.398 Q1.1 Q2.1 SW2.2 U2.8 U2.22 | length 106.3
  Top Layer w0.5: Q1.1@61.087,43.815 69.088,43.815 LED2.2@71.882,46.609 LED1.2@77.978,46.609 81.28,43.307 pad.32@81.28,38.481 81.28,37.084 U2.22@83.058,35.306 ; pad.35@61.849,14.478 Q2.1@61.849,19.304 ; pad.36@62.103,9.398 SW2.2@71.166,9.398 ; JP.8@85.598,21.082 U2.8@85.598,27.686 ; pad.10@85.598,38.481 M?.1@85.598,41.529 ; 107.95,15.494 107.962,15.506 107.962,22.594 109.208,22.594 LM7805.2@109.982,23.368 113.03,23.368 114.681,25.019 114.681,28.448 111.76,31.369 111.76,35.179 1000uF.2@110.49,36.449 113.252,39.211 113.252,44.364 111.252,46.364 111.252,48.133 111.633,48.514
  Bottom Layer w0.5: pad.36@61.849,9.652 pad.35@61.849,14.478 ; pad.32@81.28,38.481 pad.10@85.598,38.481
I/O_1: R2.2 U2.27 | length 4.6
  Top Layer w0.6: R2.2@67.437,38.735 70.358,35.814 U2.27@70.358,35.306
I/O_2: R4.2 U2.28 | length 4.6
  Top Layer w0.6: R4.2@64.389,32.512 67.183,35.306 U2.28@67.818,35.306
IQR: M?.5
MISO: M?.4 U2.18 | length 6.2
  Top Layer w0.6: U2.18@93.218,35.306 M?.4@93.218,41.529
MOSI: M?.6 U2.17 | length 15.6
  Top Layer w0.5: M?.6@90.678,44.069 90.678,44.323 92.063,45.708 94.627,45.708 95.758,44.577 U2.17@95.758,35.306
Net1000uF_1: 1000uF.1 "Vin 9-12V.2" C13.2 LM7805.1 | length 19.7
  Top Layer w0.6: LM7805.1@109.982,25.908 109.982,28.956 107.95,30.988 107.95,31.369 1000uF.1@107.95,36.449 107.95,38.481 111.252,41.783 111.252,43.053
  Bottom Layer w0.6: 1000uF.1@107.95,36.449 1000uF.1@108.204,36.703
NetC3_2: C3.2 U2.9 X2.2 | length 10.4
  Top Layer w0.6: U2.9@88.138,27.686 88.138,25.753 X2.2@91.539,22.352 C3.2@91.539,18.681
NetC4_2: C4.2 U2.10 X2.1 | length 11.1
  Top Layer w0.6: U2.10@90.678,27.686 90.678,27.636 X2.1@95.962,22.352 ; C4.2@96.619,18.784 X2.1@96.619,22.352
NetC14_2: C14.2 LM7805.3 SW.2 | length 10
  Top Layer w0.6: SW.2@109.982,10.795 LM7805.3@109.982,20.828
NetD1_1: D1.1 Q1.2 RL1.4 | length 16.1
  Top Layer w0.6: RL1.4@48.006,48.641 49.022,48.641 D1.1@56.515,41.148 ; D1.1@56.642,41.275 Q1.2@61.087,41.275
NetD2_1: D2.1 Q2.2 RL2.4 | length 15.6
  Top Layer w0.6: RL2.4@47.879,23.749 49.784,21.844 D2.1@56.515,21.844 62.357,21.844 Q2.2@62.611,21.59
NetJP_1: JP.1 R1.2 SW2.1 U2.1 | length 15.8
  Top Layer w0.6: U2.1@67.818,27.686 JP.1@67.818,21.082 R1.2@67.818,15.875 67.862,15.875 69.177,14.559 SW2.1@71.247,14.559
NetJP_2: JP.2 U2.2 | length 6.6
  Top Layer w0.6: JP.2@70.358,21.082 U2.2@70.358,27.686
NetJP_3: JP.3 U2.3 | length 6.6
  Top Layer w0.6: JP.3@72.898,21.082 U2.3@72.898,27.686
NetJP_4: JP.4 U2.4 | length 6.6
  Top Layer w0.6: JP.4@75.438,21.082 U2.4@75.438,27.686
NetJP_6: JP.6 U2.6 | length 6.6
  Top Layer w0.6: JP.6@80.518,21.082 U2.6@80.518,27.686
NetLED1_1: LED1.1 R11.1 | length 3
  Top Layer w0.6: R11.1@77.978,41.021 LED1.1@77.978,44.069
NetLED2_1: LED2.1 R12.1 | length 4.8
  Top Layer w0.6: LED2.1@71.882,44.069 74.93,41.021 R12.1@75.438,41.021
NetLED_1: LED.1 R10.1 | length 3.7
  Top Layer w0.6: LED.1@93.345,10.795 R10.1@97.028,10.795
NetOUT1_1: OUT1.1 RL1.1 | length 32.9
  Top Layer w2: OUT1.1@16.891,42.799 RL1.1@49.784,42.799
NetOUT1_2: OUT1.2 R3.2 | length 10.9
  Top Layer w0.5: OUT1.2@16.891,38.227 OUT1.2@17.272,37.846
  Top Layer w2: OUT1.2@17.272,37.846 25.654,37.846 R3.2@27.051,36.449
NetOUT2_1: OUT2.1 RL2.1 | length 34.4
  Top Layer w2: OUT2.1@16.637,17.526 RL2.1@51.054,17.526
NetOUT2_2: OUT2.2 R5.2 | length 13.3
  Top Layer w0.6: R5.2@28.575,11.557 R5.2@28.956,11.557
  Top Layer w2: OUT2.2@16.764,12.7 27.686,12.7 R5.2@29.083,11.303
NetQ1_3: Q1.3 R2.1 | length 4.6
  Top Layer w0.6: Q1.3@60.579,38.735 R2.1@65.151,38.735
NetQ2_3: Q2.3 R4.1 | length 6.7
  Top Layer w0.6: Q2.3@61.849,24.384 61.849,25.781 ; 61.976,25.908 64.389,28.321 R4.1@64.389,30.226
NetR3_1: R3.1 RL1.3 | length 8.9
  Top Layer w2: R3.1@26.924,48.641 RL1.3@35.814,48.641
NetR5_1: R5.1 RL2.3 | length 6.9
  Top Layer w2: R5.1@28.829,23.749 RL2.3@35.687,23.749
OUT1: R11.2 U2.24 | length 3.4
  Top Layer w0.6: U2.24@77.978,35.306 R11.2@77.978,38.735
OUT2: R12.2 U2.25 | length 3.4
  Top Layer w0.6: U2.25@75.438,35.306 R12.2@75.438,38.735
SCK: M?.3 U2.19 | length 6.2
  Top Layer w0.6: U2.19@90.678,35.306 M?.3@90.678,41.529
VCC: 100uF.1 Cx1.2 Cx2.2 Cx3.2 D1.2 D2.2 JP.7 M?.8 R1.1 R10.2 RL1.5 RL2.5 SW.1 U2.7 U2.20 U2.21 | length 157.1
  Top Layer w0.6: RL2.5@47.752,11.557 RL2.5@47.879,11.557 D2.2@56.388,11.557 ; D1.2@56.515,30.988 53.467,30.988 RL1.5@48.006,36.449 44.323,32.766 44.323,22.352 46.482,20.193 53.34,20.193 56.515,17.018 D2.2@56.515,11.684 67.818,11.684 ; R1.1@67.818,13.589 67.818,11.684 ; Cx1.2@83.058,15.732 Cx2.2@76.073,15.732 75.401,15.732 71.353,11.684 67.818,11.684 ; U2.7@83.058,27.686 JP.7@83.058,21.082 Cx1.2@83.058,15.732 100uF.1@102.092,15.732 ; U2.7@83.058,27.736 87.199,31.877 ; M?.8@85.598,44.069 85.487,44.069 83.693,42.275 83.693,37.719 85.598,35.814 U2.21@85.598,35.306 85.598,33.002 86.723,31.877 87.199,31.877 ; U2.20@88.138,35.306 88.138,32.816 87.199,31.877 ; R10.2@99.314,10.795 SW.1@102.362,10.795 100uF.1@102.362,15.732 ; 100uF.1@102.362,15.875 102.362,22.463 Cx3.2@103.902,24.003